# Altium PCB PCB_13W3 to DA15 Apple Display Adapter_2023-02-26.pcbdoc
Units mil, origin at the board's own origin, x right, y up, seen from the top; angles counter-clockwise.
Board outline 3377 x 2106.81 mil, 2 copper layers (Top Layer, Bottom Layer); 3 components, 27 nets, 45 pads, 0 vias.
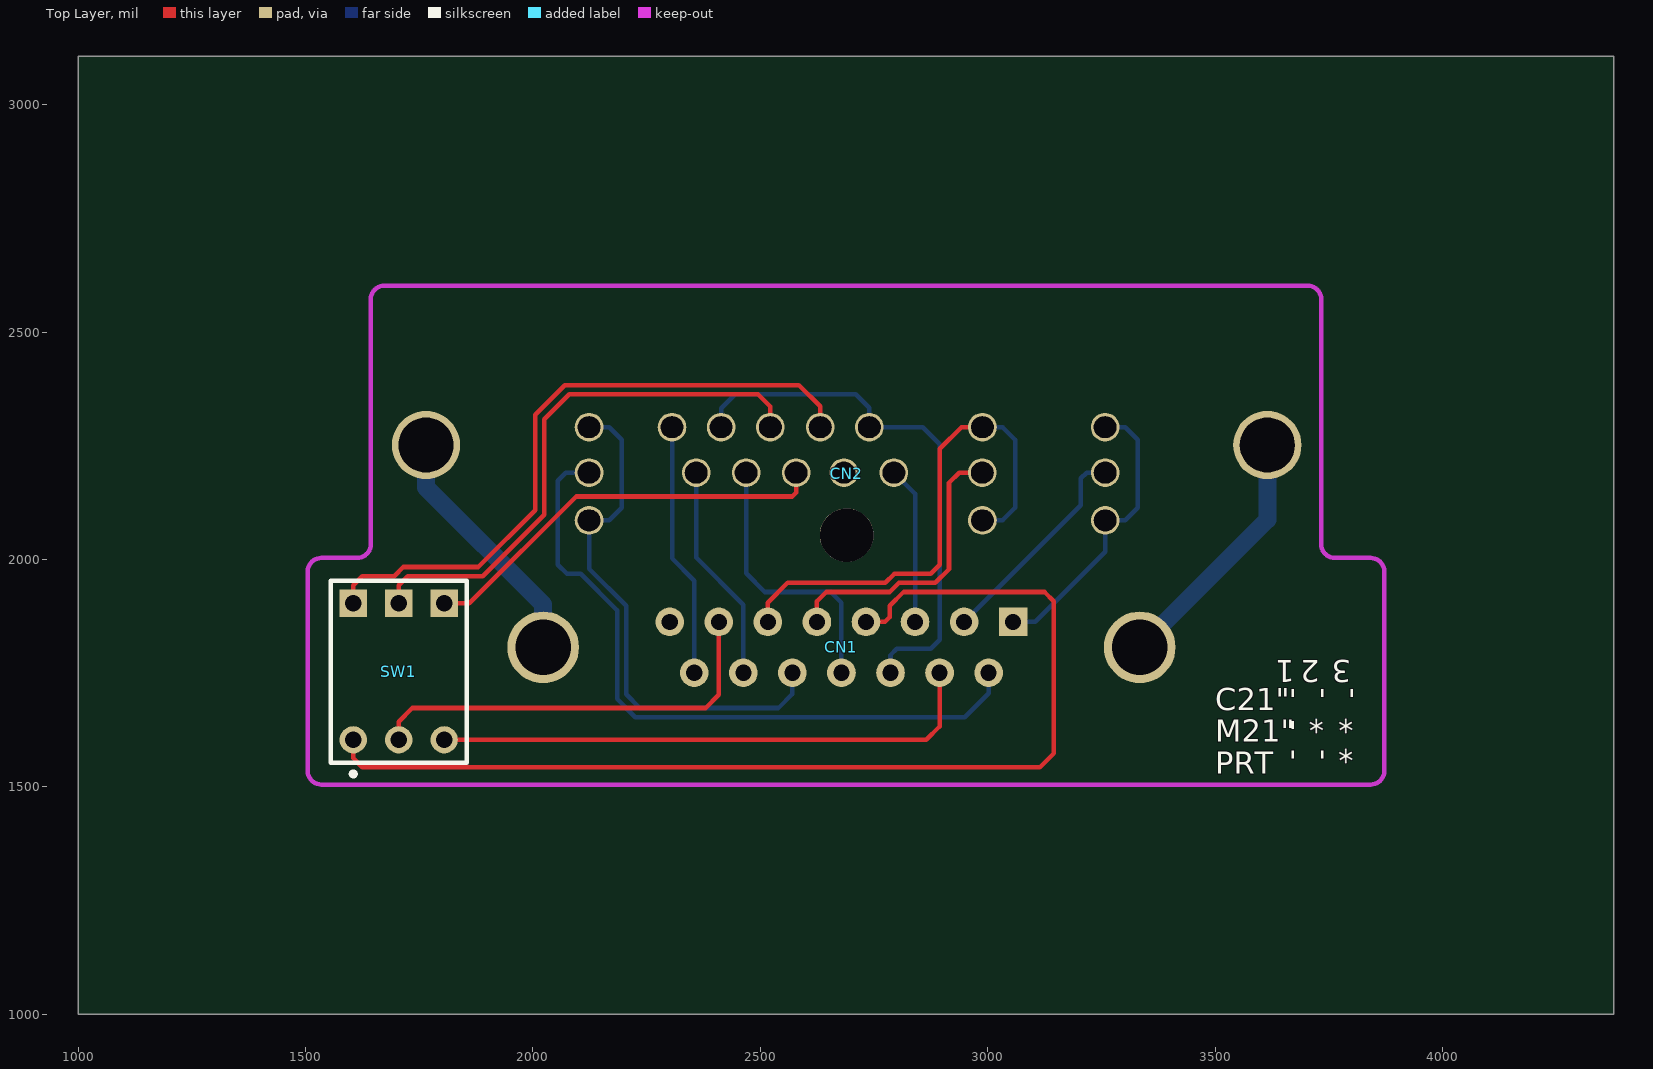
[diagram p0: Top Layer view]
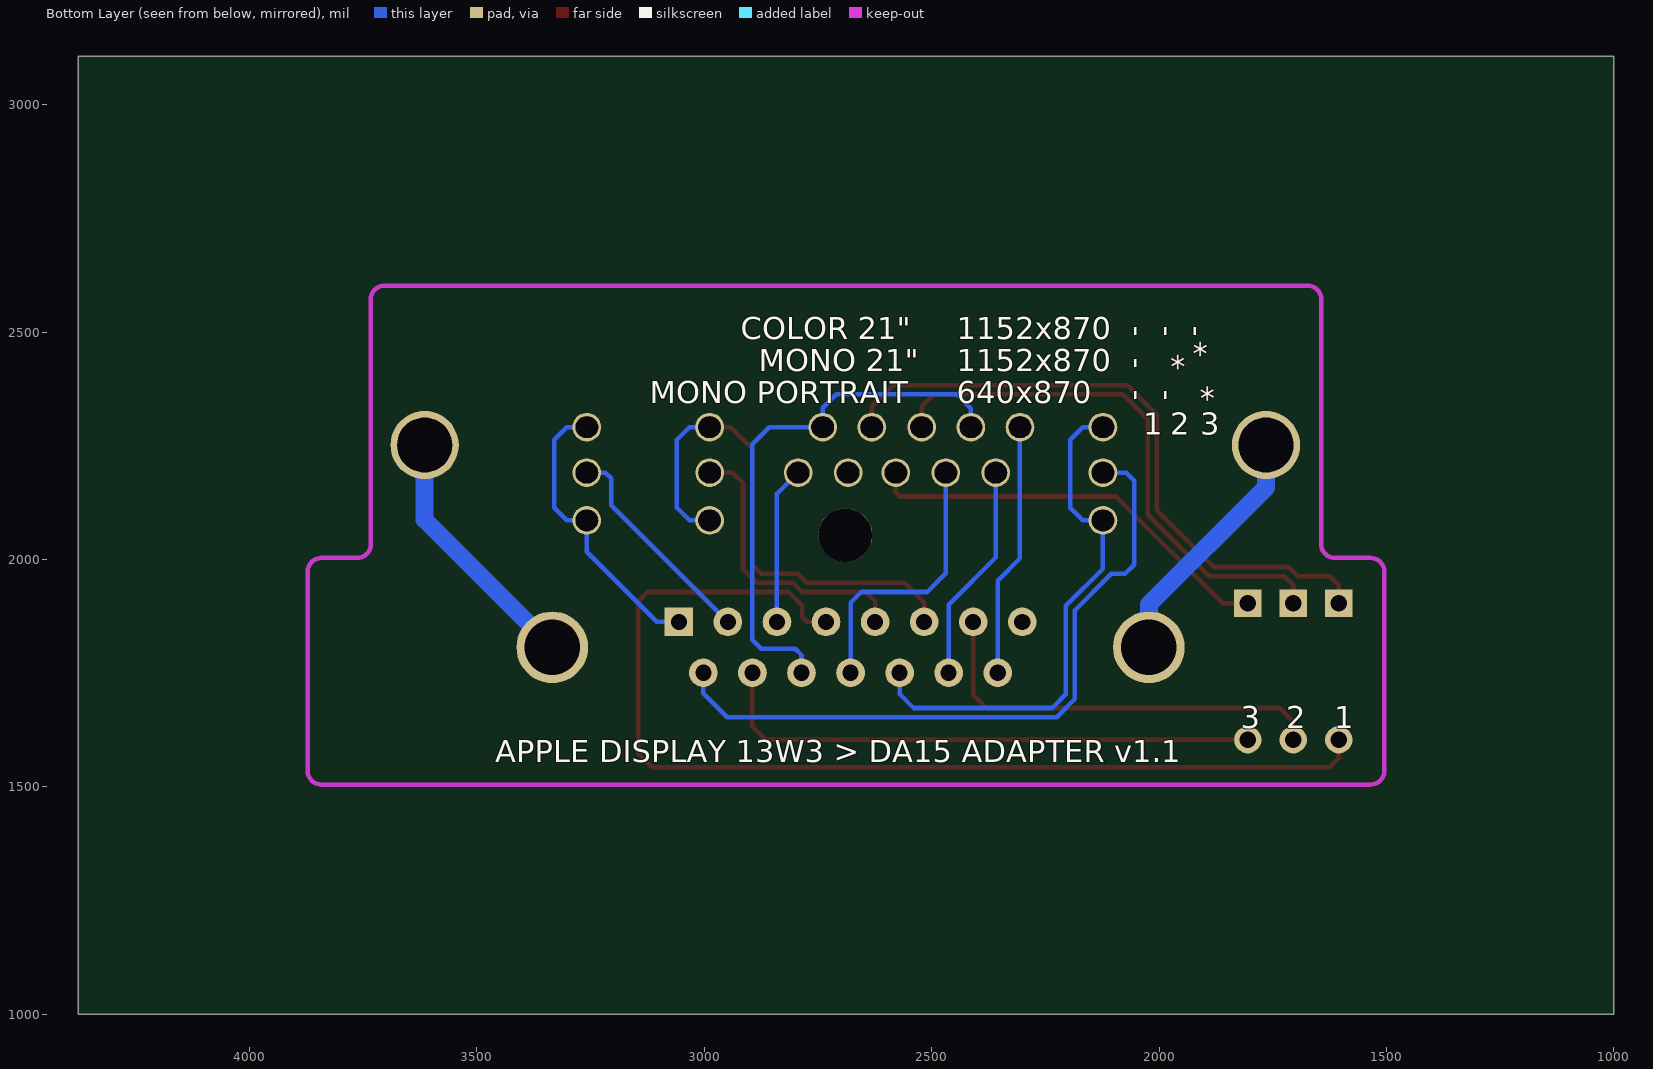
[diagram p1: Bottom Layer view, seen from below]

## Layer stack, top to bottom
Top Layer: signal copper (thickness not stored)
Dielectric: dielectric 12.6, FR-4, Dk 4.8
Bottom Layer: signal copper (thickness not stored)

## Board outline
4377,1000 1000,1000 1000,3106.81 4377,3106.81

## Components (designator, comment, footprint, x,y, rotation, side; value= is the part's Value field where it differs from the comment)
CN1 "DA15" DA15_RIGHT_ANGLE_PCB_MOUNT 2678.5,1806.84 r0 top
CN2 "13W3" 13W3_RIGHT_ANGLE_PCB_MOUNT 2690,2188.43 r0 top
SW1 "SENSE_SWITCH" DIP_SWITCH_3POS 1705,1753.43 r270 top

## Footprints (in the part's own frame and the unit in brackets; to place one, negate y for a bottom-side part, rotate by r counter-clockwise, add the part's x,y. Pads: shape width x height; smd on the part's side, far side on the other; paste and mask are expansions set on the pad)
13W3_RIGHT_ANGLE_PCB_MOUNT [mm]
  round 1.6 hole 1.2 slot 1.26 at 0 deg: 1(-8.405,0.064) 2(-5.615,0.064) 3(-2.825,0.064) 4(-0.155,0.064) 5(2.635,0.064) 6(-9.755,2.603) 7(-7.015,2.603) 8(-4.265,2.603) 9(-1.475,2.603) 10(1.265,2.603) A1(-14.389,2.603) A2(-14.389,0.064) A3(-14.389,-2.603) B1(7.582,2.603) B2(7.575,0.064) B3(7.582,-2.603) C1(14.435,2.603) C2(14.44,0.064) C3(14.44,-2.603)
  round 3.81 hole 3.05 slot 3.055 at 0 deg: 11(-23.495,1.604) 12(23.495,1.604)
DA15_RIGHT_ANGLE_PCB_MOUNT [mm]
  rect 1.6x1.6 hole 0.9: 1(9.59,1.42)
  round 1.6 hole 0.9: 2(6.85,1.42) 3(4.11,1.42) 4(1.37,1.42) 5(-1.37,1.42) 6(-4.11,1.42) 7(-6.85,1.42) 8(-9.59,1.42) 9(8.22,-1.42) 10(5.48,-1.42) 11(2.74,-1.42) 12(0,-1.42) 13(-2.74,-1.42) 14(-5.48,-1.42) 15(-8.22,-1.42)
  round 4 hole 3.1: 16(-16.66,0) 17(16.66,0)
DIP_SWITCH_3POS [mil]
  rect 60x60 hole 36: 1(-150,100) 2(-150,0) 3(-150,-100)
  round 60 hole 36: 4(150,-100) 5(150,0) 6(150,100)
  silkscreen extent -200,-150 200,150

## Free pads (board coordinates)
  round 118.11 hole 118.11 unplated: ""(2690,2053.43)

## Nets (pads, with @x,y where several pads share a name; then routed paths per layer and width w, separated by ;. In a path a pad name is that pad's centre, name@x,y a point inside that pad or via, vN(x,y) a via of type N, cw(c..) or ccw(c..) an arc to the next point about the centre after c; other vN are vias at no path point)
13W3_SENSE_0: CN2.9 SW1.3 | length 1437.2
  Top Layer w10: SW1.3 1605,1943.43 1625,1963.43 1695,1963.43 1715,1983.43 1880,1983.43 2005,2108.43 2005,2318.43 2070,2383.43 2585,2383.43 2631.9,2336.53 CN2.9
13W3_SENSE_1: CN2.8 SW1.2 | length 1210.7
  Top Layer w10: SW1.2 1705,1943.43 1725,1963.43 1890,1963.43 2025,2098.43 2025,2308.43 2080,2363.43 2495,2363.43 2522.08,2336.35 CN2.8
13W3_SENSE_2: CN2.3 SW1.1 | length 918.5
  Top Layer w10: SW1.1 1860,1903.43 2095,2138.43 2527.6,2138.43 2570,2138.43 2578.8,2147.23 CN2.3
B: CN1.9 CN2.A2 | length 1527.8
  Bottom Layer w10: CN2.A2 2072.5,2190.93 2055,2173.43 2055,1988.43 2075,1968.43 2105,1968.43 2185,1888.43 2185,1693.43 2225,1653.43 2950,1653.43 3002.1,1705.53 CN1.9
B_GND: CN1.13 CN2.A1 CN2.A3 | length 1169.8
  Bottom Layer w10: CN2.A3 2123.5,1979.93 2205,1898.43 2205,1703.43 2235,1673.43 2540,1673.43 2570.6,1704.03 CN1.13 ; CN2.A1 2167.7,2290.93 2195.2,2263.43 2195.2,2113.43 2167.7,2085.93 CN2.A3@2123.7,2085.93
CHASSIS_GND_A: CN1.16 CN2.11 | length 551.4
  Bottom Layer w39.37: CN2.11@1765,2251.53 1765,2158.43 2022.6,1900.83 CN1.16
CHASSIS_GND_B: CN1.17 CN2.12 | length 560.9
  Bottom Layer w39.37: CN1.17 3615,2087.43 CN2.12@3615,2251.53
CSYNC: CN1.3 CN2.5 | length 347.5
  Bottom Layer w10: CN2.5 2840.31,2144.36 CN1.3
DA15_SENSE_0: CN1.4 SW1.4 | length 2398.5
  Top Layer w10: SW1.4 1605,1563.43 1625,1543.43 3115,1543.43 3145,1573.43 3145,1908.43 3125,1928.43 2815,1928.43 2785,1898.43 2785,1873.43 2774.3,1862.73 CN1.4
DA15_SENSE_1: CN1.7 SW1.5 | length 928.7
  Top Layer w10: SW1.5 1705,1643.43 1735,1673.43 2380,1673.43 2408.81,1702.24 CN1.7
DA15_SENSE_2: CN1.10 SW1.6 | length 1219.6
  Top Layer w10: SW1.6 2865,1603.43 2894.25,1632.68 CN1.10
G: CN1.5 CN2.B2 | length 637.4
  Top Layer w10: CN1.5 2624.6,1908.03 2645,1928.43 2785,1928.43 2805,1948.43 2885,1948.43 2915,1978.43 2915,2168.43 2937.5,2190.93 CN2.B2
G_GND: CN1.6 CN2.B1 CN2.B3 | length 1139.4
  Top Layer w10: CN1.6 2516.7,1905.13 2560,1948.43 2775,1948.43 2795,1968.43 2875,1968.43 2895,1988.43 2895,2243.43 2942.5,2290.93 CN2.B1
  Bottom Layer w10: CN2.B1 3032.7,2290.93 3060.2,2263.43 3060.2,2113.43 3032.7,2085.93 CN2.B3@2988.7,2085.93
HSYNC: CN1.15 CN2.6 | length 560.3
  Bottom Layer w10: CN2.6 2305.94,2002.49 2354.88,1953.55 CN1.15
HSYNC_GND: CN1.14 CN2.1 | length 482.9
  Bottom Layer w10: CN2.1 2359.1,2004.33 2462.7,1900.73 CN1.14@2462.7,1750.93
R: CN1.2 CN2.C2 | length 480.7
  Bottom Layer w10: CN1.2 3205,2119.53 3205,2178.43 3217.5,2190.93 CN2.C2
R_GND: CN1.1 CN2.C1 CN2.C3 | length 651.3
  Bottom Layer w10: CN1.1 3104.3,1862.73 3258.5,2016.93 CN2.C3 3302.5,2085.93 3330,2113.43 3330,2263.43 3302.5,2290.93 CN2.C1
S$8414: 
S$8418: 
S$8422: 
S$8426: 
S$8430: 
S$8434: 
S$8438: 
S$8442: 
V/CSYNC_GND: CN1.11 CN2.7 CN2.10 | length 1197.4
  Bottom Layer w10: CN2.7 2413.8,2332.23 2445,2363.43 2710,2363.43 2739.8,2333.63 CN2.10 2857.5,2290.93 2895,2253.43 2895,1823.43 2875,1803.43 2800,1803.43 2786.4,1789.83 CN1.11
VSYNC: CN1.12 CN2.2 | length 611.8
  Bottom Layer w10: CN2.2 2468.9,1969.53 2510,1928.43 2655,1928.43 2678.5,1904.93 CN1.12
pads on no net: CN1.8 CN2.4

## Keep-outs
Keep-Out Layer:
  lines w10: 1505,1535.04 ccw(c1535,1535.04) 1535,1505.04 ; 1505,1973.43 cw(c1535,1973.43) 1535,2003.43 ; 1613.5,2003.43 ccw(c1613.5,2033.43) 1643.5,2033.43 ; 1643.5,2571.81 cw(c1673.5,2571.81) 1673.5,2601.81 ; 3703.5,2601.81 cw(c3703.5,2571.81) 3733.5,2571.81 ; 3733.5,2033.38 ccw(c3763.5,2033.38) 3763.5,2003.38 ; 3842,1505 ccw(c3842,1535) 3872,1535 ; 3842,2003.38 cw(c3842,1973.38) 3872,1973.38

## Silkscreen, mask and mechanical layers (free items; w line width, h text height)
Top Overlay:
  circle w10: c1605,1528.43 r5
  text "1" at 3675,1778.04 h49.21 r180
  text "2" at 3730,1778.04 h49.21 r180
  text "3" at 3800,1778.04 h49.21 r180
  text "-" at 3689.61,1693.43 h49.21 r90
  text "-" at 3754.61,1693.43 h49.21 r90
  text "-" at 3819.61,1693.43 h49.21 r90
  text "C21\"" at 3500,1668.83 h49.21
  text "*" at 3761.09,1636.11 h49.21 r121
  text "*" at 3826.09,1636.11 h49.21 r121
  text "-" at 3689.61,1623.43 h49.21 r90
  text "M21\"" at 3500,1598.83 h49.21
  text "*" at 3826.09,1571.11 h49.21 r121
  text "-" at 3689.61,1558.43 h49.21 r90
  text "-" at 3754.61,1558.43 h49.21 r90
  text "PRT" at 3500,1528.83 h49.21
Bottom Overlay:
  text "-" at 1939.61,2513.43 h49.21 r90
  text "-" at 2004.61,2513.43 h49.21 r90
  text "-" at 2069.61,2513.43 h49.21 r90
  text "1152x870" at 2445,2483.83 h49.21
  text "COLOR 21\"" at 2920,2483.83 h49.21
  text "-" at 2069.61,2443.43 h49.21 r90
  text "*" at 1888.91,2430.76 h49.21 r301
  text "*" at 1996.09,2430.76 h49.21 r59
  text "1152x870" at 2445,2413.83 h49.21
  text "MONO 21\"" at 2880,2413.83 h49.21
  text "-" at 2004.61,2373.43 h49.21 r90
  text "-" at 2069.61,2373.43 h49.21 r90
  text "*" at 1931.09,2360.76 h49.21 r59
  text "640x870" at 2445,2343.83 h49.21
  text "MONO PORTRAIT" at 3120,2343.83 h49.21
  text "3" at 1910,2273.83 h49.21
  text "2" at 1975,2273.83 h49.21
  text "1" at 2035,2273.83 h49.21
  text "1" at 1615,1628.83 h49.21
  text "2" at 1720,1628.83 h49.21
  text "3" at 1820,1628.83 h49.21
  text "APPLE DISPLAY 13W3 > DA15 ADAPTER v1.1" at 3460,1553.83 h49.21